# Altium PCB wudimos.PcbDoc
Units mil, origin at the board's own origin, x right, y up, seen from the top; angles counter-clockwise.
Board outline 3905 x 2695 mil, 2 copper layers (Top Layer, Bottom Layer); 39 components, 40 nets, 146 pads, 37 vias.
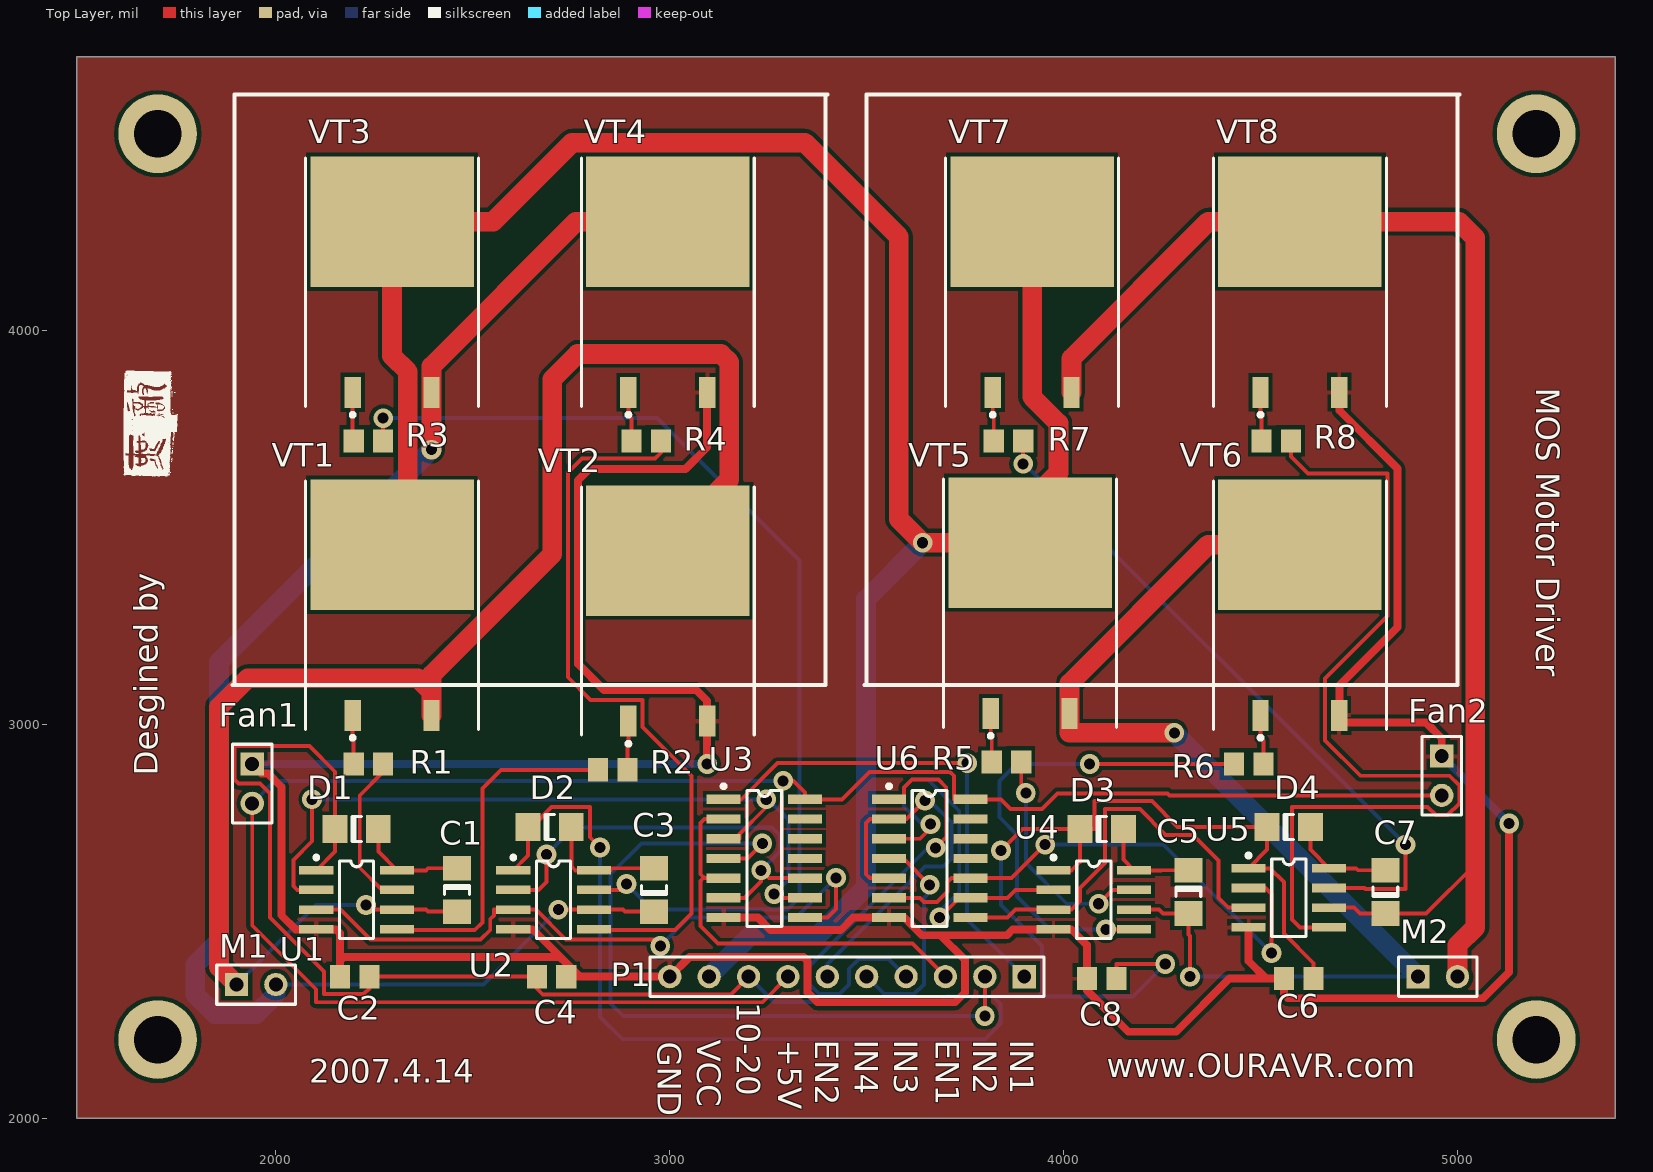
[diagram p0: Top Layer view]
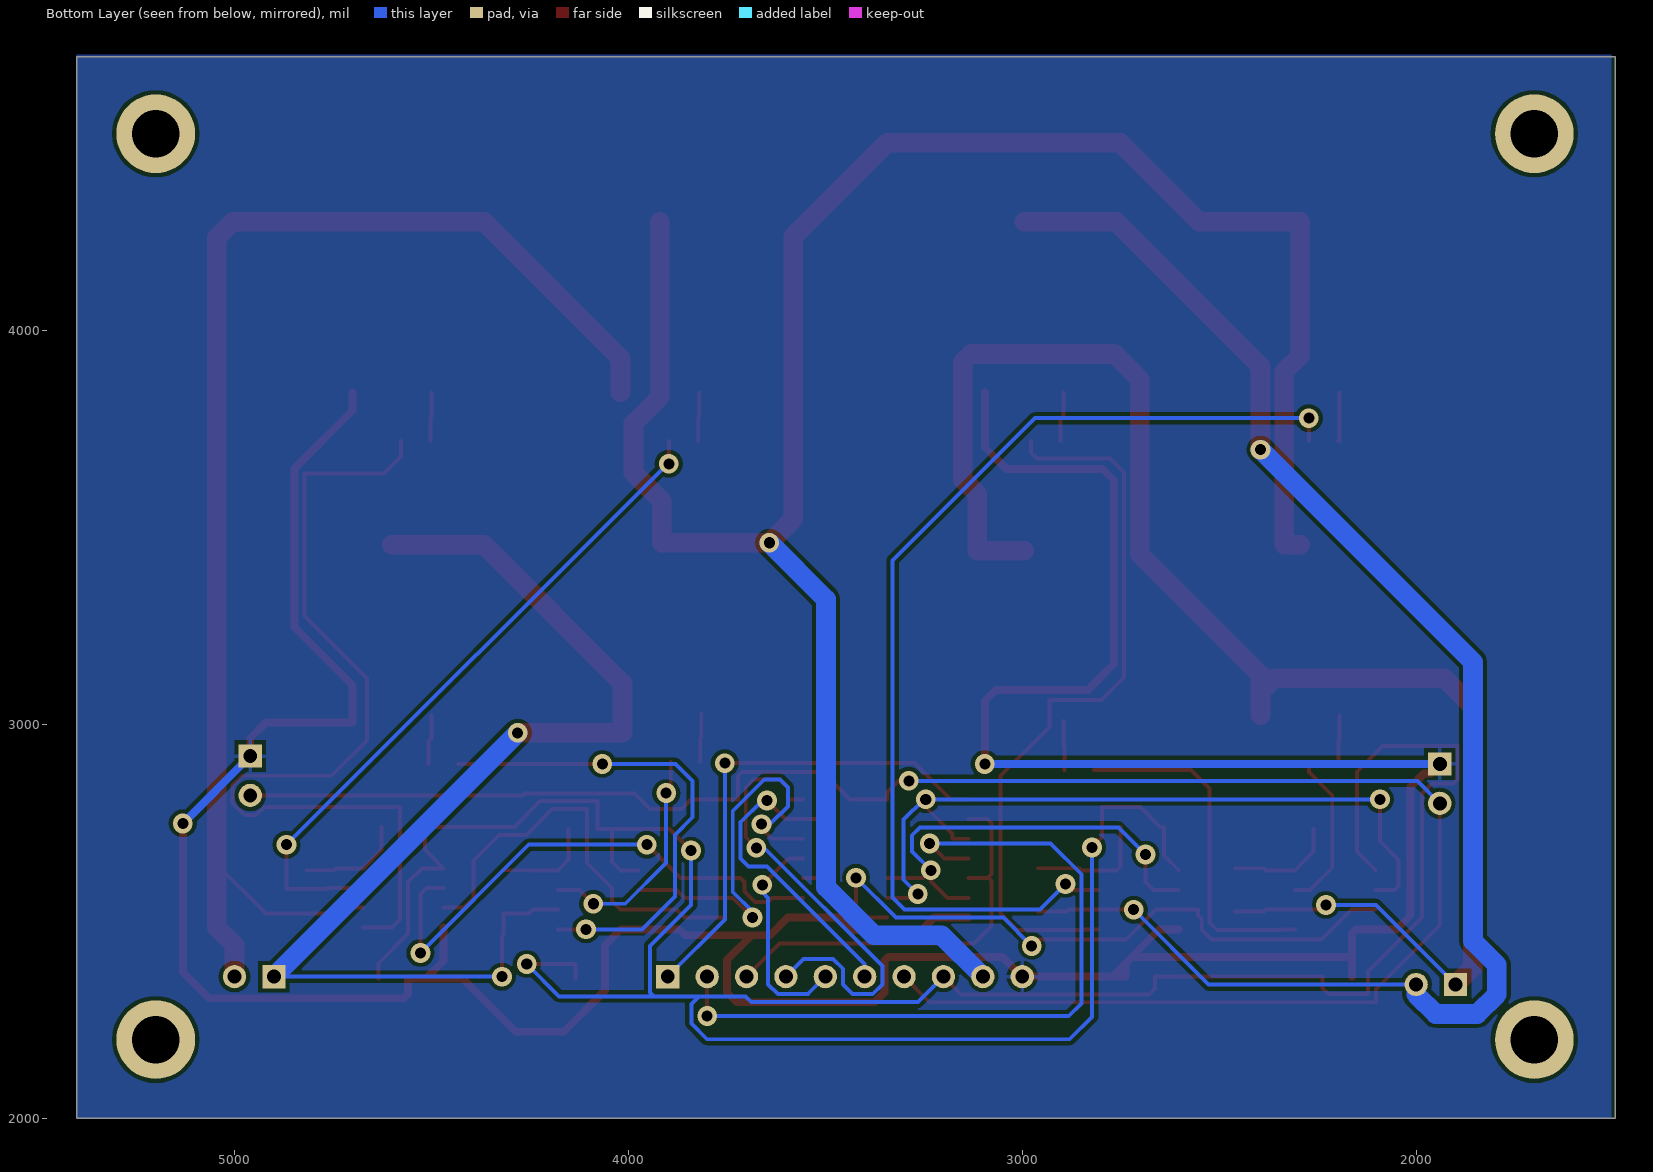
[diagram p1: Bottom Layer view, seen from below]

## Layer stack, top to bottom
Top Layer: signal copper 1.4
Dielectric: dielectric 12.6, FR-4, Dk 4.8
Bottom Layer: signal copper 1.4

## Board outline
1495,4695 1495,2000 5400,2000 5400,4695

## Design rules (kind name [scope] priority, off if disabled: settings)
Clearance [All] p1: gap=10
ComponentClearance [All] p1: gap=10 collisioncheckmode=3 verticalgap=10
PolygonConnect [All] p1: connectstyle=Relief reliefconductorwidth=10 reliefentries=4 polygonreliefangle="90 Angle"
RoutingVias [All] p1: holewidth=28 width=50 viastyle="Through Hole" minholewidth=28 minwidth=50 maxholewidth=28 maxwidth=50
SolderMaskExpansion [All] p1: expansion=4
TestPointUsage [All] p1: valid=0 allowmultiple=FALSE
Testpoint [All] p1: side=15 testpointundercomponent=TRUE minsize=40 maxsize=100 preferedsize=60 minholesize=0 maxholesize=40 preferedholesize=32 testpointgrid=1 style=1023 order=0-112345678
Width Width_2 [(InNet('GND'))] p1: maxlimit=20 minlimit=10 preferedwidth=10 toplayer_minwidth=20 toplayer_prefwidth=20 bottomlayer_minwidth=20 bottomlayer_prefwidth=20 minimp=50.000000 maximp=50.000000 favimp=50.000000
Width Width_1 [(InNet('NetC5_2') OR InNet('NetC7_1') OR InNet('NetC1_2') OR InNet('NetC3_1') OR InNet('VCC'))] p2: maxlimit=50 minlimit=10 preferedwidth=10 toplayer_minwidth=50 toplayer_prefwidth=50 bottomlayer_minwidth=50 bottomlayer_prefwidth=50 minimp=50.000000 maximp=50.000000 favimp=50.000000
Width [All] p3: maxlimit=60 minlimit=10 preferedwidth=10 minimp=50.000000 maximp=50.000000 favimp=50.000000
17 further rules are at their usual default settings.

## Components (designator, comment, footprint, x,y, rotation, side; value= is the part's Value field where it differs from the comment)
C1 "1.5UF" CC3216-1206 2460,2580 r270 top
C2 "" CR2012-0805 2200,2360 r180 top
C3 "1.5UF" CC3216-1206 2960,2580 r90 top
C4 "Cap" CR2012-0805 2700,2360 r0 top
C5 "1.5UF" CC3216-1206 4316.69,2575 r270 top
C6 "" CR2012-0805 4596.69,2355 r180 top
C7 "1.5UF" CC3216-1206 4816.69,2575 r90 top
C8 "Cap" CR2012-0805 4096.69,2355 r180 top
D1 "Diode 1N4148" CC3216-1206 2205,2735 r0 top
D2 "5819" CC3216-1206 2695,2740 r0 top
D3 "Diode 1N4148" CC3216-1206 4096.69,2735 r0 top
D4 "5819" CC3216-1206 4571.69,2740 r0 top
Fan1 "Header 2" HDR1X2 1940,2900 r270 top
Fan2 "Header 2" HDR1X2 4960,2920 r270 top
M1 "Motor" HDR1X2 1900,2340 r0 top
M2 "Motor" HDR1X2 4900,2360 r0 top
P1 "Header 10" HDR1X10 3900,2360 r180 top (schematic designator P?)
R1 "20" CR2012-0805 2235,2900 r180 top
R2 "20" CR2012-0805 2855,2885 r0 top
R3 "20" CR2012-0805 2235,3720 r0 top
R4 "20" CR2012-0805 2940,3720 r0 top
R5 "20" CR2012-0805 3855,2905 r180 top
R6 "20" CR2012-0805 4470,2900 r0 top
R7 "20" CR2012-0805 3860,3720 r0 top
R8 "20" CR2012-0805 4540,3720 r0 top
U1 "IR2104S" SO-8 2205,2555 r270 top
U2 "IR2104S" SO-8 2705,2555 r270 top
U3 "MC74HC00AD" 751A-02 3240,2660 r270 top
U4 "IR2104S" SO-8 4076.69,2555 r270 top
U5 "IR2104S" SO-8 4571.69,2560 r270 top
U6 "MC74HC00AD" 751A-02 3660,2660 r270 top
VT1 "IRF540NS" D2PAK 2295,3240 r0 top
VT2 "IRF540NS" D2PAK 2995,3225 r0 top
VT3 "IRF540NS" D2PAK 2295,4060 r0 top
VT4 "IRF540NS" D2PAK 2995,4060 r0 top
VT5 "IRF540NS" D2PAK 3915,3245 r0 top
VT6 "IRF540NS" D2PAK 4600,3240 r0 top
VT7 "IRF540NS" D2PAK 3920,4060 r0 top
VT8 "IRF540NS" D2PAK 4600,4060 r0 top

## Footprints (in the part's own frame and the unit in brackets; to place one, negate y for a bottom-side part, rotate by r counter-clockwise, add the part's x,y. Pads: shape width x height; smd on the part's side, far side on the other; paste and mask are expansions set on the pad)
751A-02 [mm] "Small Outline; 14 Leads; Body Width 3.9 mm; Pitch 1.27 mm"
  rect 0.6x2.2 smd: 1(-3.81,-2.625) 2(-2.54,-2.625) 3(-1.27,-2.625) 4(0,-2.625) 5(1.27,-2.625) 6(2.54,-2.625) 7(3.81,-2.625) 8(3.81,2.625) 9(2.54,2.625) 10(1.27,2.625) 11(0,2.625) 12(-1.27,2.625) 13(-2.54,2.625) 14(-3.81,2.625)
  silkscreen extent -4.78,-2.75 4.37,1.13
CC3216-1206 [mm] "Chip Capacitor; Body 3.2 x 1.6 mm (LxW typ)"
  rect 1.6x1.8 smd: 1(-1.4,0) 2(1.4,0)
  silkscreen extent -0.3,-0.8 0.3,0.8
CR2012-0805 [mm] "Chip Resistor; Body 2.0 x 1.3 mm (LxW typ)"
  rect 1.3x1.5 smd: 1(-0.95,0) 2(0.95,0)
D2PAK [mm] "D2-PAK/TO-263-AB; 3 Leads (1 Cropped); Body 15.5 (inc. leads) x 10.5 mm (LxW max)"
  rect 1.05x2 smd: 1(-2.54,-5.5) 3(2.54,-5.5)
  rect 10.55x8.4 smd: 2(0,5.5)
  silkscreen extent -5.57,-7.07 5.57,9.6
HDR1X2 [mm] "Connector; Header; 2 Position"
  rect 1.5x1.5 hole 0.9: 1(0,0)
  round 1.5 hole 0.9: 2(2.54,0)
  silkscreen extent -1.27,-1.27 3.81,1.27
HDR1X10 [mm] "Connector; Header; 10 Position"
  rect 1.5x1.5 hole 0.9: 1(0,0)
  round 1.5 hole 0.9: 2(2.54,0) 3(5.08,0) 4(7.62,0) 5(10.16,0) 6(12.7,0) 7(15.24,0) 8(17.78,0) 9(20.32,0) 10(22.86,0)
  silkscreen extent -1.27,-1.27 24.13,1.27
SO-8 [mm] "Plastic Small Outline; 8 Leads; Body Width 3.9 mm"
  rect 0.55x2.2 smd: 1(-1.905,-2.6) 2(-0.635,-2.6) 3(0.635,-2.6) 4(1.905,-2.6) 5(1.905,2.6) 6(0.635,2.6) 7(-0.635,2.6) 8(-1.905,2.6)
  silkscreen extent -2.85,-2.72 2.5,1.1

## Part data
C1 C5: library part "Cap Semi", "Capacitor (Semiconductor SIM Model)"
C2 C6: library part Cap, "104"
C3 C7: library part Cap, "Capacitor"
C4 C8: "104"
D1 D3: "High Conductance Fast Diode"
D2 D4: library part "Diode 1N4148", "High Conductance Fast Diode"
Fan1 Fan2: "Header, 2-Pin"
M1 M2: "Motor, General Kind"
P1: "Header, 10-Pin"
R1 R2 R3 R4 R5 R6 R7 R8: library part Res2, "Resistor"
U1 U2 U4 U5: "High and Low Side Driver"
U3 U6: "Quad 2-Input NAND Gate"
VT1 VT2 VT3 VT4 VT5 VT6 VT7 VT8: library part IRF540N, "HEXFET Power MOSFET"

## Free pads (board coordinates)
  round 200 hole 120: 0(1700,2200) 1(5200,2200) 2(5200,4500) 3(1700,4500)

## Via types
v1: diameter 50, hole 28, Top Layer to Bottom Layer, 37 vias

## Nets (pads, with @x,y where several pads share a name; then routed paths per layer and width w, separated by ;. In a path a pad name is that pad's centre, name@x,y a point inside that pad or via, vN(x,y) a via of type N, cw(c..) or ccw(c..) an arc to the next point about the centre after c; other vN are vias at no path point)
10-20: C2.1 C4.1 C6.1 C8.1 D1.1 D2.1 D3.1 D4.1 P1.8 U1.1 U2.1 U4.1 U5.1 | length 7620.5
  Top Layer w10: U1.1 2149.88,2677.24 D1.1 2149.88,2880.12 2085,2945 1895.47,2945 1895.47,2860 1905.47,2850 1960,2850 1985,2825 1985,2509.64 2122.01,2372.64 2122.01,2315.47 2222.87,2315.47 2237.4,2330 C2.1 C4.1 2662.6,2330 2677.6,2315 3155,2315 P1.8 ; U2.1 2639.88,2667.24 D2.1 2650,2740 2677,2767 2677,2768 2700,2791 2797,2791 2797,2714 v1(2823,2688) ; v1(3841,2680) 3896,2735 D3.1 ; U4.1 4020,2630 4041.57,2651.57 D3.1 ; C8.1 4134.09,2392 v1(4258,2392) ; C6.1 4634.09,2394 4559,2469.09 4559,2600 4524,2635 U5.1 4516.57,2682.24 D4.1 4289.5,2740 4224.06,2805.44 4078.54,2805.44 4078,2804.9 4078,2735 D3.1
  Bottom Layer w10: v1(2823,2688) 2823,2258 2880,2201 3800,2201 3840,2241 3840,2290 3820,2310 ; P1.8 3264.53,2295.47 3688.11,2295.47 3702.64,2310 4176,2310 v1(4258,2392) ; v1(3841,2680) 3841,2542 3945,2438 3945,2320 3935,2310
EN1: P1.3 U3.2 U3.5 | length 1057.9
  Top Layer w10: 3088,2610 3078,2620 3078,2750 3088,2760 U3.2 ; U3.5 3085,2610 3078,2603 3078,2489 3123,2444 3616,2444 P1.3
EN2: P1.6 U6.2 U6.5 | length 1006.2
  Top Layer w10: U6.5 3508,2610 3498,2620 3498,2750 3508,2760 U6.2 3601,2760 v1(3648,2807)
  Bottom Layer w10: P1.6 3400,2392 3648,2640 3695,2640 3715,2660 3715,2752.03 3660.03,2807 v1(3648,2807)
GND: C2.2 C4.2 C6.2 C8.2 Fan1.1 Fan2.1 P1.10 U1.4 U2.4 U3.7 U4.4 U5.4 U6.7 VT2.3 VT4.3 VT6.3 VT8.3 | length 9898.9
  Top Layer w20: Fan1.1 1964.02,2875.98 1980,2875.98 2013.94,2842.04 2013.94,2516.06 2050,2480 U1.4 2152.6,2480 2162.6,2470 2162.6,2400 ; C2.2 2162.6,2400 ; U2.4 2652,2480 2754.7,2377.3 2772,2360 ; v1(3095,2900) VT2.3 3095,3060 3067.16,3087.84 2833.16,3087.84 2767,3154 2767,3620 2796,3649 3040,3649 3095,3704 VT4.3 ; U3.7 3224,2510 3256,2478 3434,2478 3466,2510 U6.7 3595.04,2510 3640.04,2465 3687,2465 ; U5.4 4469,2485 4469,2400 4514,2355 ; VT8.3 4700,3797.68 4847.68,3650 4847.68,3247.06 4700,3099.38 VT6.3 4700,3005 4920,3005 4960,2965 Fan2.1 ; v1(5131,2749) 5131,2371 5065,2305 4570,2305 4559.29,2315.71 C6.2 4514,2355 ; 2162.6,2400 2172.6,2410 2721.4,2410 2737.4,2394 C4.2 2772,2360 ; 2772,2360 P1.10 3050,2410 3340,2410 3350,2400 3350,2320 3375,2295 3725,2295 3750,2320 3750,2402 3687,2465 ; 3687,2465 3856,2465 3871,2480 U4.4 4019.29,2480 4059.29,2440 C8.2 4059.29,2324.71 4164,2220 4285.77,2220 4420.77,2355 4514,2355
  Bottom Layer w20: Fan1.1 v1(3095,2900) ; Fan2.1 v1(5131,2749)
IN1: P1.1 U3.1 | length 1258.5
  Top Layer w10: U3.1 3181.62,2810 3273.62,2902 v1(3755,2902)
  Bottom Layer w10: v1(3755,2902) 3755,2505 P1.1
IN2: P1.2 U3.4 | length 1922.6
  Top Layer w10: U3.4 3197,2660 v1(3235,2698) ; v1(3800,2260) P1.2
  Bottom Layer w10: v1(3235,2698) 2928,2698 2850,2620 2850,2292 2882,2260 v1(3800,2260)
IN3: P1.4 U6.1 | length 1181.7
  Top Layer w10: U6.1 3595,2810 3595,2840 3615,2860 3682,2860 3702,2840 3702,2714.03 v1(3675,2687.03)
  Bottom Layer w10: P1.4 3555,2405 3480,2405 3455,2380 3455,2340 3430.47,2315.47 3379.53,2315.47 3355,2340 3355,2387.03 3655,2687.03 v1(3675,2687.03)
IN4: P1.5 U6.4 | length 563.9
  Top Layer w10: U6.4 3593,2660 v1(3660,2593)
  Bottom Layer w10: P1.5 3544.53,2315.47 3620.47,2315.47 3645,2340 3645,2560 3660,2575 v1(3660,2593)
NetC1_1: C1.1 D1.2 U1.8 | length 279.3
  Top Layer w10: D1.2 2260.12,2677.24 U1.8 2381,2630 2386.12,2635.12 C1.1
NetC1_2: C1.2 M1.1 U1.6 VT1.3 VT2.2 | length 4035.8
  Top Layer w10: v1(2229,2542) 2241,2530 U1.6 2381,2530 2386.12,2524.88 C1.2
  Top Layer w50: M1.1 1855.47,2384.53 1855.47,3044.47 1928.84,3117.84 2360,3117.84 2395,3082.84 ; VT1.3 2395,3082.84 ; VT2.2 3114,3441.54 3114,3585 3151,3622 3151,3920 3130,3941 2766,3941 2702,3877 2702,3433 2395,3126 2395,3082.84
  Bottom Layer w10: M1.1 2102,2542 v1(2229,2542)
NetC3_1: C3.1 M1.2 U2.6 VT3.3 VT4.2 | length 3907.3
  Top Layer w10: v1(2717,2530) U2.6 2881,2530 2886.12,2524.88 C3.1
  Top Layer w50: v1(2395,3698) VT3.3 2395,3909.54 2762,4276.54 VT4.2
  Bottom Layer w10: M1.2 2527,2340 v1(2717,2530)
  Bottom Layer w50: M1.2 2000,2315 1950,2265 1845,2265 1795,2315 1795,2390 1855.47,2450.47 1855.47,3158.47 v1(2395,3698)
NetC3_2: C3.2 D2.2 U2.8 | length 316.1
  Top Layer w10: D2.2 2750.12,2640 2760.12,2630 U2.8 2849.57,2630 2854.68,2635.12 C3.2
NetC5_1: C5.1 D3.2 U4.8 | length 254
  Top Layer w10: D3.2 4151.81,2657.24 U4.8 4247,2630 4247.12,2630.12 C5.1
NetC5_2: C5.2 M2.1 U4.6 VT5.3 VT6.2 | length 2880.2
  Top Layer w10: U4.6 4242,2530 4252.12,2519.88 C5.2 4316.69,2467.31 4321,2463 v1(4321,2360)
  Top Layer w50: v1(4281,2979) 4015,2979 VT5.3 4015,3104.54 4367,3456.54 VT6.2
  Bottom Layer w10: v1(4321,2360) M2.1
  Bottom Layer w50: v1(4281,2979) M2.1
NetC7_1: C7.1 M2.2 U5.6 VT7.3 VT8.2 | length 3594.9
  Top Layer w10: U5.6 4737,2535 4752.12,2519.88 C7.1 4920,2519.88 5045,2644.88
  Top Layer w50: VT7.3 4020,3929.54 4367,4276.54 VT8.2 5004,4276.54 5045,4235.54 5045,2484.88 5000,2439.88 M2.2
NetC7_2: C7.2 D4.2 U5.8 | length 269.2
  Top Layer w10: D4.2 4626.81,2682.24 U5.8 4742,2635 4746.88,2630.12 C7.2
NetR1_1: R1.1 U1.7 | length 405.9
  Top Layer w10: R1.1 2272.4,2879.4 2213,2820 2213,2636.44 2269.44,2580 U1.7
NetR1_2: R1.2 VT1.1 | length 124.5
  Top Layer w10: VT1.1 2195,2962.6 2197.6,2960 R1.2
NetR2_1: R2.1 U1.5 | length 878.8
  Top Layer w10: U1.5 2340,2480 2342,2478 2505,2478 2524.33,2497.33 2524.33,2837.33 2572,2885 R2.1
NetR2_2: R2.2 VT2.1 | length 124.5
  Top Layer w10: R2.2 2892.4,2945 2895,2947.6 VT2.1
NetR3_1: R3.1 VT3.1 | length 126.1
  Top Layer w10: VT3.1 2195,3720 R3.1
NetR3_2: R3.2 U2.7 | length 2688
  Top Layer w10: R3.2 v1(2272.4,3778) ; U2.7 2875,2580 v1(2890,2595)
  Bottom Layer w10: v1(2272.4,3778) 2968,3778 3328.99,3417.01 3328.99,2560.5 3298.49,2530 2955,2530 v1(2890,2595)
NetR4_1: R4.1 VT4.1 | length 126.6
  Top Layer w10: VT4.1 2895,3784.6 2902.6,3777 R4.1
NetR4_2: R4.2 U2.5 | length 1878.9
  Top Layer w10: U2.5 2841,2480 2843,2478 3013,2478 3055,2520 3055,2870 2931,2994 2931,3062.84 2799.16,3062.84 2742,3120 2742,3640 2777,3675 2962.4,3675 2977.4,3690 R4.2
NetR5_1: R5.1 U4.7 | length 593.4
  Top Layer w10: R5.1 3892.4,2837.6 v1(3904,2826) ; v1(4089,2545) 4124,2580 U4.7
  Bottom Layer w10: v1(3904,2826) 3904,2649 4008,2545 v1(4089,2545)
NetR5_2: R5.2 VT5.1 | length 124.5
  Top Layer w10: VT5.1 3815,2967.6 3817.6,2965 R5.2
NetR6_1: R6.1 U4.5 | length 1257.5
  Top Layer w10: v1(4066,2900) R6.1 ; v1(4107.5,2480) U4.5
  Bottom Layer w10: v1(4066,2900) 3880,2900 3837,2857 3837,2764.65 3881.65,2720 3881.65,2563.35 3965,2480 v1(4107.5,2480)
NetR6_2: R6.2 VT6.1 | length 126.5
  Top Layer w10: VT6.1 4500,2965.4 4507.4,2958 R6.2
NetR7_1: R7.1 VT7.1 | length 124.5
  Top Layer w10: VT7.1 3820,3782.6 3822.6,3780 R7.1
NetR7_2: R7.2 U5.7 | length 1735.9
  Top Layer w10: v1(3897.4,3662) R7.2 ; U5.7 4764,2585 4766,2583 4868,2583 v1(4868,2695)
  Bottom Layer w10: v1(3897.4,3662) 3901,3662 v1(4868,2695)
NetR8_1: R8.1 VT8.1 | length 124.5
  Top Layer w10: VT8.1 4500,3782.6 4502.6,3780 R8.1
NetR8_2: R8.2 U5.5 | length 2313.9
  Top Layer w10: R8.2 4577.4,3680 4620.4,3637 4822.68,3637 4822.68,3276 4664,3117.32 4664,2960 4754,2870 4980,2870 5005,2845 5005,2800 4975,2770 4945,2770 4924,2791 4580,2791 4580,2505 4600,2485 U5.5
NetU1_2: U1.2 U3.3 U3.9 | length 1987.2
  Top Layer w10: v1(2092,2810) 2092,2703.67 2044.33,2656 2044.33,2590 2054.33,2580 U1.2 ; U3.3 3177,2710 3177,2722 3245,2790 v1(3245,2810) ; v1(3265,2570) 3275,2560 U3.9
  Bottom Layer w10: v1(2092,2810) v1(3245,2810) 3250,2810 3301,2759 3301,2606 v1(3265,2570)
NetU1_3: U1.3 U2.3 U3.8 | length 1683.5
  Top Layer w10: U1.3 2164,2530 2240,2454 2520,2454 2544.33,2478.33 2544.33,2506 2554,2515.67 2554,2530 U2.3 2660,2530 2736,2454 2960,2454 v1(2976,2438) ; U3.8 3400,2510 3422,2532 v1(3422,2611)
  Bottom Layer w10: v1(2976,2438) 3048,2510 3321,2510 v1(3422,2611)
NetU2_2: U2.2 U3.6 U3.10 | length 1161.8
  Top Layer w10: U2.2 2667,2580 2687,2600 v1(2687,2670) ; U3.6 3190,2560 3232,2602 v1(3232,2630) 3252,2610 U3.10
  Bottom Layer w10: v1(2687,2670) 2756,2739 3260,2739 3280,2719 3280,2678 v1(3232,2630)
NetU4_2: U4.2 U6.3 U6.9 | length 1050.6
  Top Layer w10: U6.3 3635,2710 3662,2737 v1(3662,2747) ; v1(3685,2510) 3735,2560 U6.9 3858,2560 3878,2580 U4.2
  Bottom Layer w10: v1(3662,2747) 3640,2747 3595,2792 3595,2840 3615,2860 3655,2860 3735,2780 3735,2575 3685,2525 v1(3685,2510)
NetU4_3: U4.3 U5.3 U6.8 | length 1079.3
  Top Layer w10: U6.8 3858,2510 3878,2530 U4.3 4020,2530 4042,2552 4042,2585 4105,2648 4105,2785.44 4193.56,2785.44 4259,2720 4328,2720 4393,2655 4393,2560 4418,2535 U5.3
NetU5_2: U5.2 U6.6 U6.10 | length 1378.4
  Top Layer w10: U6.6 3635,2560 3645,2550 3679,2550 3705,2576 3705,2600 3715,2610 U6.10 3868,2610 v1(3953,2695) ; U5.2 4513,2585 4528,2570 v1(4528,2420)
  Bottom Layer w10: v1(3953,2695) 4253,2695 v1(4528,2420)
VCC: P1.9 VT1.2 VT3.2 VT5.2 VT7.2 | length 5719.1
  Top Layer w50: VT1.2 2335,3456.54 2335,3896 2295,3936 VT3.2 2551.54,4276.54 2752,4477 3343,4477 3581.46,4238.54 3581.46,3522.07 v1(3642,3461.54) VT5.2 3915,3567 3987.24,3639.24 3987.24,3764.65 3920,3831.88 VT7.2
  Bottom Layer w50: P1.9 3205,2465 3376.4,2465 3498.41,2587.01 3498.41,3317.95 v1(3642,3461.54)
VDD: Fan1.2 Fan2.2 P1.7 U3.14 U6.14 | length 4991.9
  Top Layer w10: Fan1.2 1940,2490 2102.01,2327.99 2102.01,2295.47 2102.48,2295 3235,2295 P1.7 ; v1(3288,2857) 3314,2857 3343.35,2827.65 U3.14 3437,2810 3507,2880 3712,2880 3722,2870 3722,2810 U6.14 3840.71,2810 3864.81,2785.9 3944.81,2785.9 3984.35,2825.44 4263.5,2825.44 4268.93,2820 Fan2.2
  Bottom Layer w10: Fan1.2 1997,2857 v1(3288,2857)
pads on no net: U3.11 U3.12 U3.13 U6.11 U6.12 U6.13

## Polygon pours and split planes (outlines as drawn)
GND on Top Layer (solid, remove dead copper): 1495,4695 1495,2000 5400,2000 5400,4695
GND on Bottom Layer (solid, remove dead copper): 1505,4700 1505,2000 5400,2000 5400,4700

## Silkscreen, mask and mechanical layers (free items; w line width, h text height)
Top Overlay:
  drawing of 4950 lines, arcs and shapes, not listed
  text "MOS Motor Driver" at 5200,3855 h60 r270
  text "Desgined by" at 1700,2870 h60 r90
  text "10-20" at 3170,2295 h60 r270
  text "VCC" at 3070,2200 h60 r270
  text "+5V" at 3275,2200 h60 r270
  text "EN2" at 3370,2200 h60 r270
  text "IN4" at 3470,2200 h60 r270
  text "IN3" at 3570,2200 h60 r270
  text "EN1" at 3675,2200 h60 r270
  text "IN2" at 3770,2200 h60 r270
  text "IN1" at 3865,2200 h60 r270
  text "GND" at 2970,2195 h60 r270
  text "www.OURAVR.com" at 4110,2105 h60
  text "2007.4.14" at 2085,2090 h60
Mechanical 1:
  lines w10: 1500,2000 1500,4700 1505,4705 5400,4705 5400,2000 1500,2000